# Altium PCB Mfd3.PcbDoc (part 2 of 2)
Units mm, origin at the board's own origin, x right, y up, seen from the top; angles counter-clockwise.
Board outline 190 x 263 mm, 2 copper layers (Top Layer, Bottom Layer), stack 1.671 mm thick; 173 components, 92 nets, 564 pads, 39 vias.
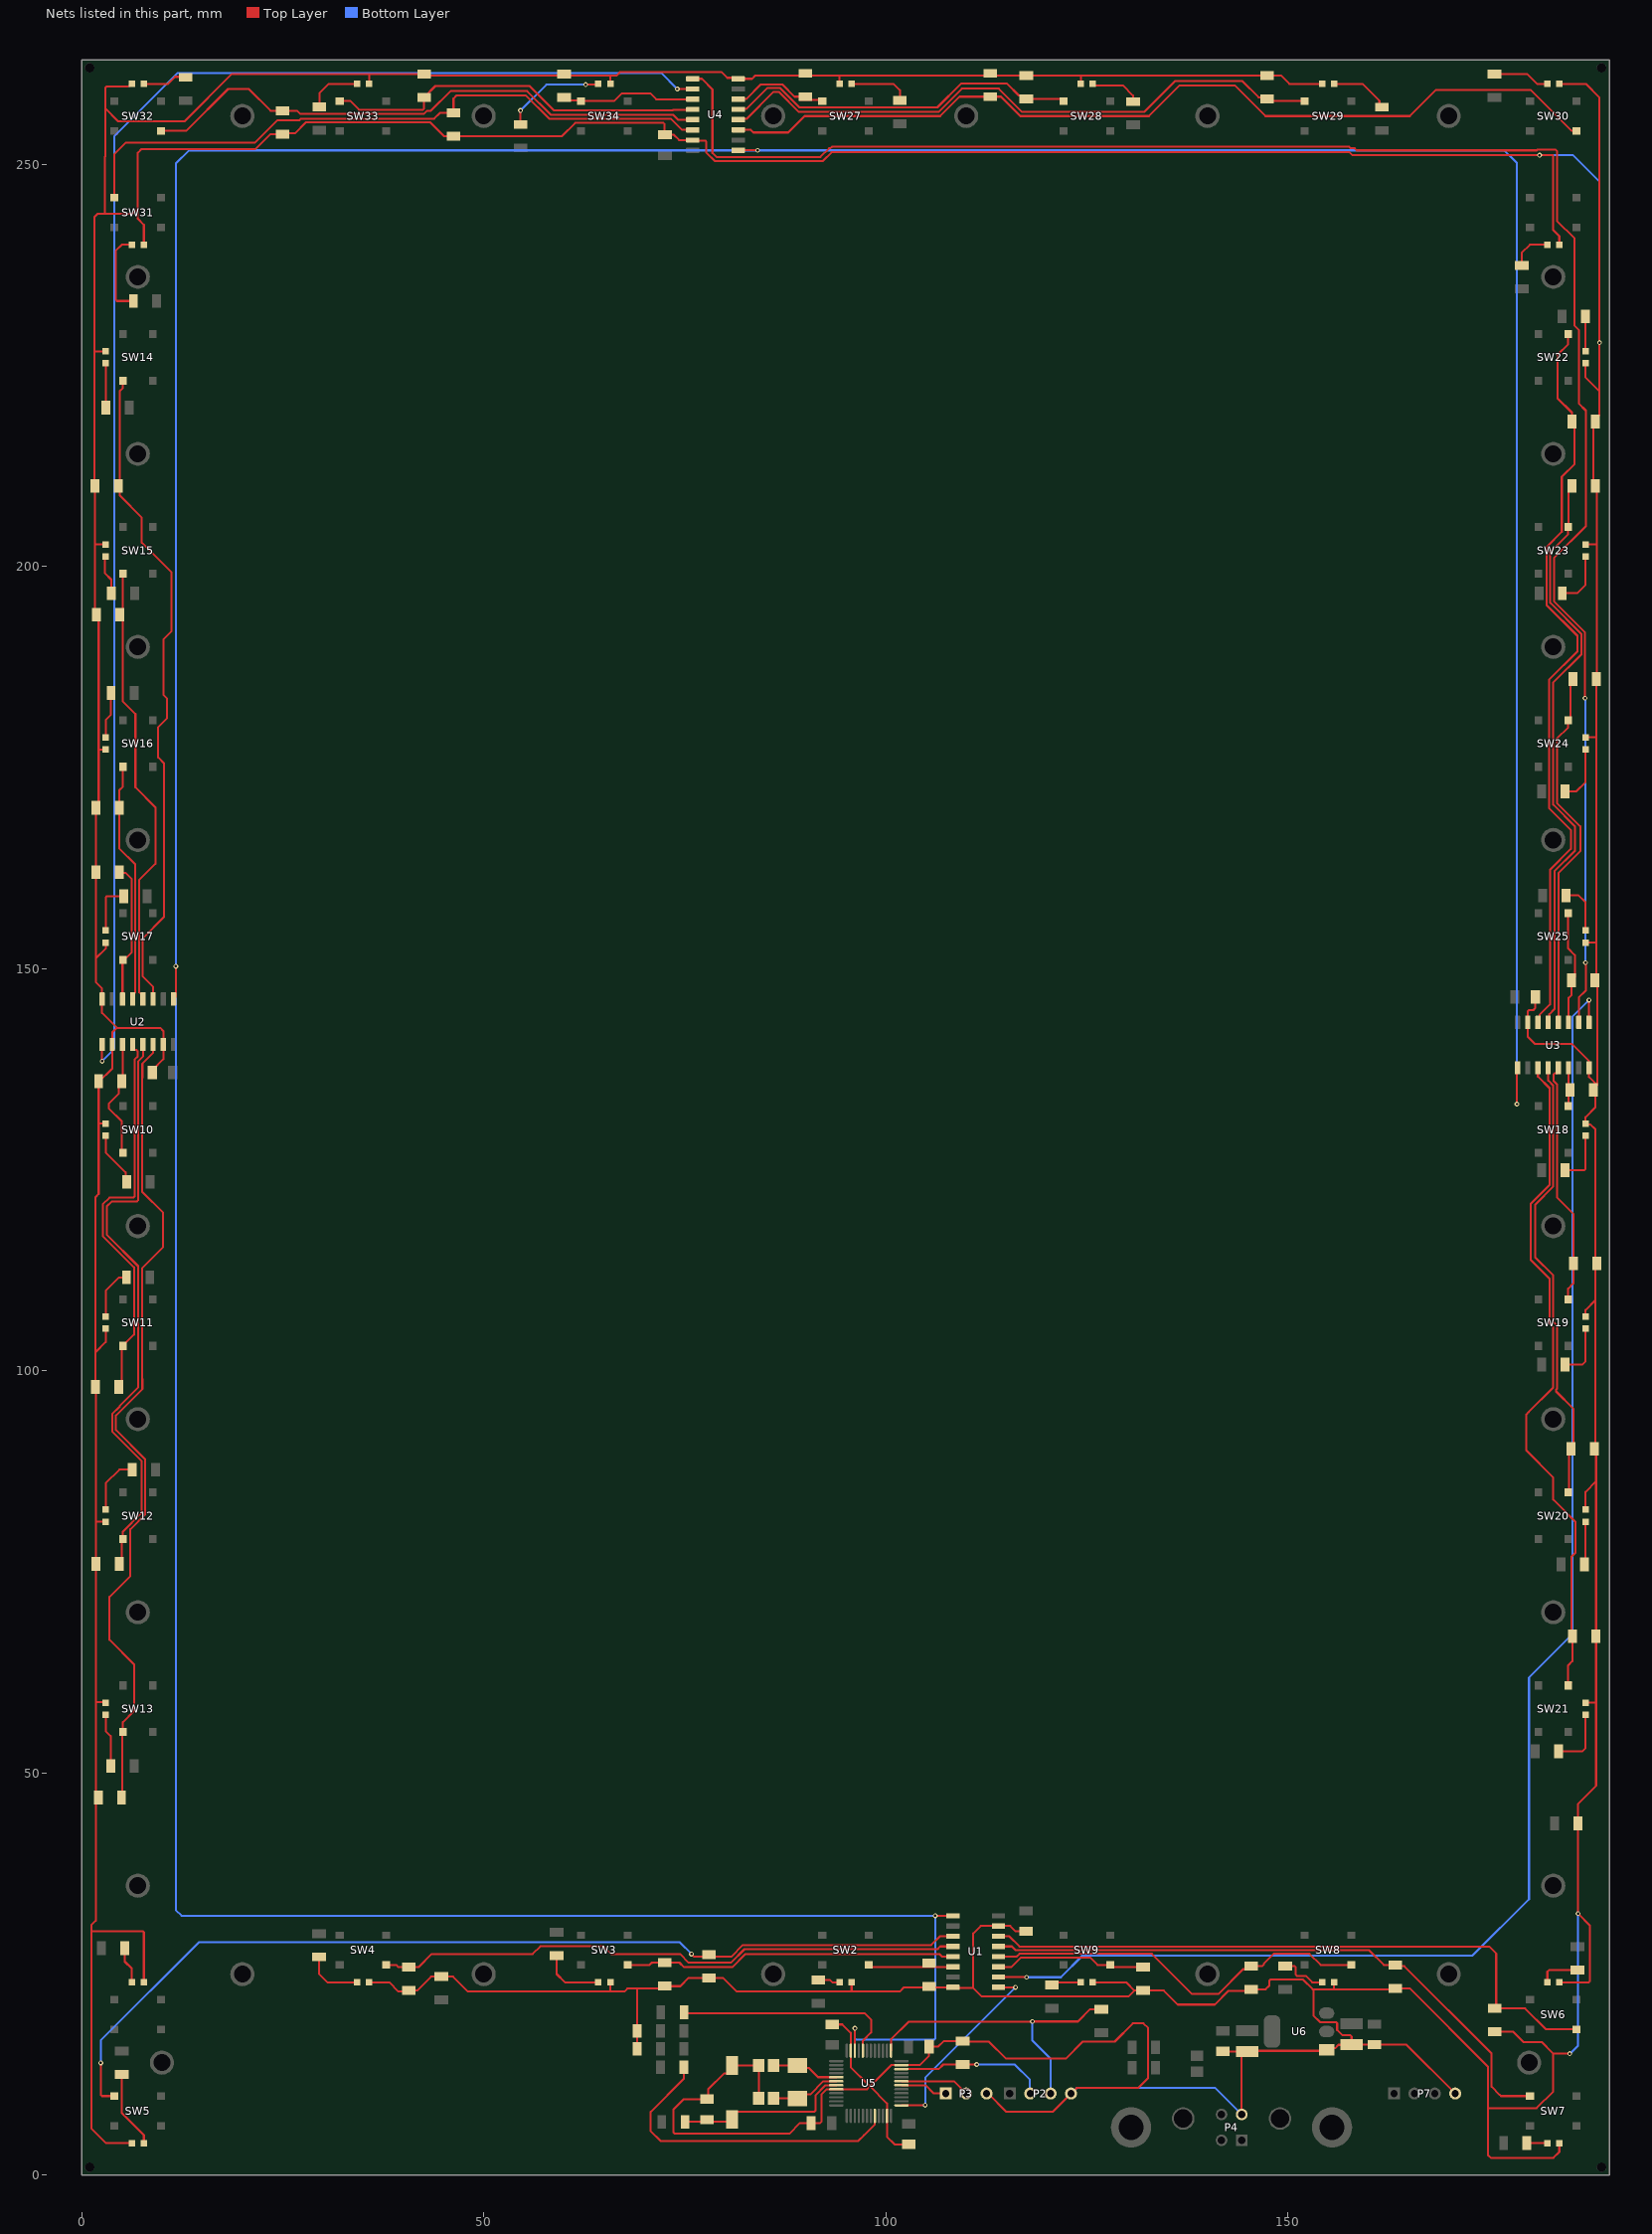
[diagram p2: the nets of this part, all layers, seen from the top]

## Via types
v1: diameter 0.6, hole 0.3, Top Layer to Bottom Layer, tented both sides, 39 vias

## Nets (pads, with @x,y where several pads share a name; then routed paths per layer and width w, separated by ;. In a path a pad name is that pad's centre, name@x,y a point inside that pad or via, vN(x,y) a via of type N, cw(c..) or ccw(c..) an arc to the next point about the centre after c; other vN are vias at no path point) (continued)
GND: C1.1 C2.1 C3.1 C4.1 C7.2 C8.1 C9.2 C10.1 C11.1 C12.1 C13.1 C14.1 C15.1 C16.2 C17.2 LED1.2 LED2.2 LED3.2 LED4.2 LED5.2 LED6.2 LED7.2 LED8.2 LED9.2 LED10.2 LED11.2 LED12.2 LED13.2 LED14.2 LED15.2 LED16.2 LED17.2 LED18.2 LED19.2 LED20.2 LED21.2 LED22.2 LED23.2 LED24.2 LED25.2 LED26.2 LED27.2 LED28.2 LED29.2 LED30.2 LED31.2 LED32.2 LED33.2 LED34.2 P2.4 P3.3 P4.4 P7.4 R1.1 R3.1 R5.1 R7.1 R9.1 R11.1 R13.1 R15.1 R17.1 R19.1 R21.1 R23.1 R25.1 R27.1 R29.1 R31.1 R33.1 R35.1 R37.1 R39.1 R41.1 R43.1 R45.1 R47.1 R49.1 R51.1 R53.1 R55.1 R57.1 R59.1 R61.1 R63.1 R65.1 R67.1 R77.1 SW35.2 U1.8 U1.15 U2.8 U2.10 U2.15 U3.8 U3.15 U4.8 U4.15 U5.8 U5.23 U5.35 U5.47 U6.1 W0.1 W1.1 | length 1442.2
  Top Layer w0.254: R25.1@1.615,210.135 1.615,226.85 ; R25.1@1.646,210 1.657,209.989 1.657,202.85 ; LED15.2@2.875,202.75 1.757,202.75 1.657,202.85 ; LED13.2@3,58.75 2.9,58.85 1.775,58.85 ; LED12.2@3,81.25 1.875,81.25 1.775,81.15 ; LED11.2@3,105.25 3,103.595 1.725,102.32 ; LED10.2@3,130.75 2.225,130.75 2.125,130.85 ; LED17.2@3,153.25 3,152.495 1.775,151.27 ; LED16.2@3,177.25 2.225,177.25 2.125,177.15 ; LED14.2@3,226.75 1.715,226.75 1.615,226.85 ; LED5.2@6.25,4 3.075,4 1.225,5.85 1.225,30.35 ; LED32.2@6.25,260 5.977,259.727 5.88,259.727 5.828,259.675 3.124,259.675 2.975,259.526 2.975,256.9 ; LED1.2@7.75,24 7.75,30.201 7.601,30.35 1.225,30.35 ; LED31.2@7.75,240 7.75,242.475 7,243.225 7,244.509 ; C2.1@8.8,137.1 8.8,137.375 10.175,138.75 U2.15@10.175,140.575 10.175,142.25 9.775,142.65 4.4,142.65 ; R63.1@25,253.75 23.5,253.75 21.639,251.889 7.473,251.889 7,251.416 7,244.509 ; R63.1@25.062,253.687 25.207,253.832 26.528,253.832 27.912,255.216 43.359,255.216 45.086,253.489 R61.1@46.25,253.489 59.739,253.489 61.386,255.136 72.351,255.136 72.5,254.987 72.5,253.724 C4.1@72.55,253.673 73.627,253.673 74.296,253.004 U4.15@75.997,253.004 76.071,252.93 77.551,252.93 77.7,252.781 77.7,251.43 78.738,250.392 92.168,250.392 93.276,251.5 157.65,251.5 158.025,251.125 v1(181.293,251.125) 183,251.125 183,241.81 183.75,241.06 LED26.2@183.75,240 ; LED4.2@35.75,24 38.257,24 39.407,22.85 40.698,22.85 40.855,23.007 41.78,23.007 43.473,24.7 R1.1@44.75,24.7 46.2,24.7 48.05,22.85 65.75,22.85 65.85,22.85 ; LED33.2@35.75,260 35.75,261.125 35.85,261.225 ; LED3.2@65.75,24 65.75,22.95 65.85,22.85 ; LED34.2@65.75,260 65.75,260.899 65.85,260.999 ; W1.1@69.1,15.831 W0.1@69.1,17.944 ; W0.1@69.106,17.95 69.106,23.194 69.131,23.219 ; C7.2@83.85,13.65 SW35.2@80.875,13.65 80.875,13.308 80.252,12.685 79.91,12.685 77.907,10.682 77.907,9.613 C8.1@77.769,9.475 74.9,9.475 73.6,8.175 73.6,5.324 73.749,5.175 88.014,5.175 89.339,6.5 C13.1@90.725,6.5 91.851,6.5 92,6.649 92,10.05 92.65,10.7 97.669,10.7 98.035,11.065 ; C9.2@84.199,9.575 C7.2@84.199,13.65 ; C12.1@93.35,18.75 94.6,18.75 95.65,17.7 U5.47@95.65,15.5 95.65,13.45 97.795,11.305 98.035,11.065 ; LED27.2@94.25,260 94.25,260.932 94.15,261.032 ; LED2.2@95.75,24 95.75,22.856 95.756,22.85 ; C15.1@102.85,3.852 101.092,3.852 100.15,4.794 100.15,8.95 98.035,11.065 ; 104.625,261.032 94.15,261.032 ; 104.693,261.032 R55.1@117.472,261.032 ; R77.1@109.55,16.625 112.825,16.625 114.946,14.504 122.379,14.504 124.5,16.625 128.468,16.625 130.729,18.886 132.048,18.886 132.632,18.302 132.632,12.107 131.375,10.85 123.746,10.85 123.068,10.172 P2.4@123.035,10.172 120.771,7.909 114.992,7.909 112.728,10.172 P3.3@112.54,10.172 ; R77.1@109.55,16.675 107.197,16.675 106.522,16 C14.1@105.375,16 105.375,14.858 104.217,13.7 100.669,13.7 98.274,11.305 98.035,11.065 ; 110.799,23.348 110.726,23.275 108.454,23.275 U1.8@108.353,23.376 105.799,23.376 105.7,23.475 R3.1@105.4,23.475 105.4,23.376 102.275,23.376 101.749,22.85 95.756,22.85 ; C1.1@117.45,30.327 116.131,30.327 115.462,30.996 U1.15@114.003,30.996 111.805,30.996 110.875,30.066 110.875,23.424 110.875,23.272 111.928,22.219 130.18,22.219 130.925,22.965 ; R55.1@117.472,261.032 124.15,261.033 ; LED28.2@124.25,260 124.25,260.933 124.15,261.033 ; LED9.2@125.75,24 129.89,24 130.925,22.965 ; C11.1@141.925,15.402 C17.2@144.923,15.402 ; P4.4@144.25,7.567 144.25,14.802 144.823,15.375 C17.2@144.95,15.375 ; C17.2@144.95,15.475 154.715,15.475 U6.1@154.825,15.585 155.033,15.793 155.859,15.793 156.284,16.217 C16.2@157.804,16.217 ; R15.1@145.425,23.125 147.233,23.125 147.706,23.598 147.706,24.197 147.855,24.346 151.866,24.346 153.087,23.125 153.183,23.125 ; R15.1@145.837,22.925 142.6,22.925 140.9,21.225 136.3,21.225 134.56,22.965 R17.1@132,22.965 130.925,22.965 ; LED29.2@154.25,260 150.175,260 149.142,261.033 R57.1@147.423,261.033 124.15,261.033 ; LED8.2@155.75,24 155.75,23.248 155.627,23.125 ; C16.2@157.849,16.172 C16.2@157.916,16.238 ; P7.4@170.81,10.172 164.744,16.238 C10.1@160.766,16.238 C16.2@157.916,16.238 ; R11.1@175.725,17.85 178,17.85 179.275,16.575 181.55,16.575 182.875,15.25 183,15.125 ; C3.1@180.775,146.5 180.775,145.113 180.506,144.844 179.974,144.844 179.825,144.695 U3.15@179.825,143.325 179.825,141.55 180.75,140.625 185.35,140.625 187.445,138.53 U3.8@187.445,137.675 187.445,136.517 188.112,135.85 188.137,135.85 188.475,135.512 188.475,148.446 R49.1@188.375,148.546 ; LED7.2@183.75,4 183.75,2.9 183.025,2.175 175.225,2.175 174.887,2.513 174.887,8.35 ; LED6.2@183.75,24 187.401,24 187.55,24.149 187.55,31.05 v1(186.075,32.525) R51.1@186.075,43.75 186.075,46.175 188.325,48.425 188.325,58.85 ; LED30.2@183.75,260 187.05,260 188.75,258.3 v1(188.75,227.825) 188.75,221.75 ; v1(185.054,15.125) 183,15.125 ; LED21.2@187,58.75 188.225,58.75 188.325,58.85 ; LED20.2@187,82.75 187,84.95 188.325,86.275 ; LED19.2@187,106.75 187,107.578 188.225,108.803 ; LED25.2@187,153.25 188.25,153.25 188.35,153.15 ; LED24.2@187,178.75 188.35,178.75 ; LED23.2@187,202.75 188.325,202.75 188.425,202.85 ; LED22.2@187,225.25 187,223.5 188.75,221.75 ; R43.1@187.975,218 187.975,210.25 R45.1@188.225,210 188.425,209.8 188.425,202.85 ; R35.1@188,134.925 188.225,134.7 188.225,132.775 187,131.55 LED18.2@187,130.75 187.132,130.618 187.632,130.618 188.225,130.025 R37.1@188.225,113.375 ; R47.1@188.15,185.8 R47.1@188.35,186 ; R49.1@188.175,148.546 188.35,148.721 188.35,153.15 ; R43.1@188.225,218 188.225,218.3 188.75,218.825 188.75,221.75 ; R37.1@188.4,113.375 188.225,113.2 188.225,108.803 ; 1.225,30.35 1.225,31.099 1.775,31.649 1.775,58.85 ; 1.615,226.85 1.615,243.474 1.971,243.829 2.875,243.829 ; 1.657,202.85 1.657,194 2.125,193.532 2.125,177.15 ; 1.725,102.32 1.725,121.6 2.125,122 2.125,130.85 ; 1.725,102.32 R31.1@1.725,98 1.775,97.95 1.775,81.15 ; 1.775,58.85 R29.1@1.775,76 1.775,81.15 ; 1.775,151.27 R19.1@1.775,162 1.8,162.025 R21.1@1.8,170 2.125,170.325 2.125,177.15 ; 1.775,151.27 1.775,148.325 2.555,147.545 U2.8@2.555,146.225 2.555,144.495 4.4,142.65 ; 2.125,130.85 2.125,135.9 3.825,137.6 U2.10@3.825,140.575 3.825,142.075 4.4,142.65 ; 2.875,243.829 2.875,250.917 2.975,251.017 2.975,256.9 ; 2.875,243.829 6.32,243.829 7,244.509 ; 2.975,256.9 4.51,255.365 12.848,255.365 18.708,261.225 35.85,261.225 ; 35.85,261.225 R65.1@42.6,261.225 42.826,260.999 65.85,260.999 ; 65.85,22.85 67.5,22.85 67.869,23.219 69.131,23.219 ; 65.85,260.999 66.505,260.999 66.98,261.475 79.563,261.475 80.288,260.75 81.521,260.75 U4.8@81.647,260.624 83.374,260.624 83.782,261.032 94.15,261.032 ; 69.131,23.219 72.277,23.219 72.566,23.509 74.458,23.509 75.5,24.55 76,24.55 R9.1@78,24.55 79.765,24.55 81.465,22.85 95.756,22.85 ; 153.183,23.125 155.627,23.125 ; 153.183,23.125 153.183,19.873 154.023,19.033 155.978,19.033 156.127,18.884 156.127,18.065 156.793,17.399 157.767,17.399 157.916,17.25 C16.2@157.916,16.238 ; 155.627,23.125 155.75,23.125 163.225,23.125 R13.1@163.35,23.25 165.15,23.25 174.887,13.513 174.887,8.35 ; 174.887,8.35 180.925,8.35 183,10.425 183,12.875 183,15.125 ; 188.225,108.803 188.225,90.45 R39.1@188.1,90.325 188.325,90.1 188.325,86.275 ; 188.325,58.85 188.325,86.275 ; 188.35,153.15 188.35,178.75 ; 188.35,178.75 R47.1@188.35,186 ; R47.1@188.35,186 188.425,186.075 188.425,202.85
  Bottom Layer w0.254: P2.4@123.035,10.172 123.068,10.172 123.746,10.85 140.967,10.85 P4.4@144.25,7.567 ; v1(181.293,251.125) 185.47,251.125 188.75,247.845 v1(188.75,227.825) ; v1(185.054,15.125) 185.077,15.125 186.075,16.123 v1(186.075,32.525)
NetC7_1: C7.1 U5.5 X1.2 | length 8.1
  Top Layer w0.254: C7.1@86.4,13.65 X1.2@89,13.65 89.307,13.343 90.432,13.343 91.575,12.2 U5.5@93.85,12.2
NetC8_2: C8.2 R76.2 SW35.1 U5.7 | length 22
  Top Layer w0.254: R76.2@75.05,6.65 77.499,6.65 80.575,6.65 SW35.1@80.875,6.95 80.875,7.277 81.498,7.9 91.097,7.9 91.246,8.049 91.246,9.938 92.508,11.2 U5.7@93.85,11.2
NetC9_1: C9.1 U5.6 X1.1 | length 8.4
  Top Layer w0.254: C9.1@86.4,9.575 86.425,9.55 X1.1@89,9.55 89.5,10.05 90.6,10.05 92.25,11.7 U5.6@93.85,11.7
NetLED1_1: LED1.1 R2.1 | length 4.6
  Top Layer w0.254: R2.1@5.375,28.25 5.375,26.575 6.25,25.7 LED1.1@6.25,24
NetLED2_1: LED2.1 R4.1 | length 2.8
  Top Layer w0.254: R4.1@91.6,24.3 93.05,24.3 93.35,24 LED2.1@94.25,24
NetLED3_1: LED3.1 R6.1 | length 7.9
  Top Layer w0.254: R6.1@59.075,27.325 59.075,25.025 60.1,24 LED3.1@64.25,24
NetLED4_1: LED4.1 R8.1 | length 7.3
  Top Layer w0.254: R8.1@29.525,27.15 29.525,25.05 30.575,24 LED4.1@34.25,24
NetLED5_1: LED5.1 R10.1 | length 9.7
  Top Layer w0.254: R10.1@5,12.533 5,7.75 7.75,5 LED5.1@7.75,4
NetLED6_1: LED6.1 R12.1 | length 5.1
  Top Layer w0.254: LED6.1@182.25,24 182.267,24.017 182.267,25.309 182.467,25.509 R12.1@186,25.509
NetLED7_1: LED7.1 R14.1 | length 2.5
  Top Layer w0.254: R14.1@179.725,4 LED7.1@182.25,4
NetLED8_1: LED8.1 R16.1 | length 6
  Top Layer w0.254: R16.1@149.677,26.025 150.826,26.025 150.975,25.876 150.975,24.949 151.124,24.8 152.212,24.8 153.012,24 LED8.1@154.25,24
NetLED9_1: LED9.1 R18.1 | length 3.7
  Top Layer w0.254: R18.1@120.655,23.669 120.985,24 LED9.1@124.25,24
NetLED10_1: LED10.1 R34.1 | length 6.8
  Top Layer w0.254: LED10.1@3,129.25 3,127.15 5.475,124.675 5.475,123.625 R34.1@5.6,123.5
NetLED11_1: LED11.1 R32.1 | length 6.5
  Top Layer w0.254: LED11.1@3,106.75 3,109.976 4.65,111.626 R32.1@5.595,111.626
NetLED12_1: LED12.1 R30.1 | length 7.6
  Top Layer w0.254: LED12.1@3,82.75 3,86.025 4.7,87.725 R30.1@6.3,87.725 ; R30.1@5.975,87.9 R30.1@6.225,88.15
NetLED13_1: LED13.1 R28.1 | length 6.6
  Top Layer w0.254: LED13.1@3,57.25 3,55.225 3.625,54.6 R28.1@3.625,50.9
NetLED14_1: LED14.1 R26.1 | length 5.5
  Top Layer w0.254: LED14.1@3,225.25 3,219.77 R26.1@3.018,219.751
NetLED15_1: LED15.1 R24.1 | length 4.9
  Top Layer w0.254: LED15.1@2.875,201.25 2.875,199.194 3.7,198.369 R24.1@3.7,196.65
NetLED16_1: LED16.1 R22.1 | length 5.8
  Top Layer w0.254: LED16.1@3,178.75 3,180.9 3.669,181.569 R22.1@3.669,184.286
NetLED17_1: LED17.1 R20.1 | length 6.4
  Top Layer w0.254: LED17.1@3,154.75 3,158.851 3.149,159 R20.1@5.229,159
NetLED18_1: LED18.1 R36.1 | length 6.8
  Top Layer w0.254: R36.1@184.45,124.952 186.851,124.952 187,125.101 LED18.1@187,129.25
NetLED19_1: LED19.1 R38.1 | length 6.8
  Top Layer w0.254: R38.1@184.45,100.772 186.6,100.772 187,101.172 LED19.1@187,105.25
NetLED20_1: LED20.1 R40.1 | length 5.4
  Top Layer w0.254: R40.1@186.85,75.931 187,76.081 LED20.1@187,81.25
NetLED21_1: LED21.1 R42.1 | length 7.6
  Top Layer w0.254: R42.1@183.675,52.7 186.6,52.7 187,53.1 LED21.1@187,57.25
NetLED22_1: LED22.1 R44.1 | length 4.3
  Top Layer w0.254: R44.1@186.975,231.075 186.975,226.775 LED22.1@187,226.75
NetLED23_1: LED23.1 R46.1 | length 6.8
  Top Layer w0.254: R46.1@184.125,196.672 185.962,196.672 187,197.709 LED23.1@187,201.25
NetLED24_1: LED24.1 R48.1 | length 7.1
  Top Layer w0.254: R48.1@184.45,172.042 185.875,172.042 187,173.167 LED24.1@187,177.25
NetLED25_1: LED25.1 R50.1 | length 6.3
  Top Layer w0.254: R50.1@184.6,159.106 186.15,159.106 187,158.256 LED25.1@187,154.75
NetLED26_1: LED26.1 R52.1 | length 5.2
  Top Layer w0.254: R52.1@179.075,237.425 179.075,238.976 180.099,240 LED26.1@182.25,240
NetLED27_1: LED27.1 R54.1 | length 7.6
  Top Layer w0.254: LED27.1@95.75,260 100.95,260 101.75,259.2 R54.1@101.75,257.947
NetLED28_1: LED28.1 R56.1 | length 6.3
  Top Layer w0.254: LED28.1@125.75,259.8 129.482,259.8 130.747,258.535 R56.1@130.747,257.787
NetLED29_1: LED29.1 R58.1 | length 7.4
  Top Layer w0.254: LED29.1@155.75,260 159.26,260 161.377,257.882 161.377,257.398 R58.1@161.675,257.1
NetLED30_1: LED30.1 R60.1 | length 7.8
  Top Layer w0.254: R60.1@175,261.225 R60.1@175.7,261.225 179.75,261.225 180.975,260 LED30.1@182.25,260
NetLED31_1: LED31.1 R62.1 | length 10.7
  Top Layer w0.254: LED31.1@6.25,240 5,240 4.25,239.25 4.25,233.15 4.4,233 R62.1@6.45,233
NetLED32_1: LED32.1 R64.1 | length 5.6
  Top Layer w0.254: LED32.1@7.75,260 10.75,260 11.625,260.875 12.861,260.875 R64.1@12.932,260.804
NetLED33_1: LED33.1 R66.1 | length 6.9
  Top Layer w0.254: R66.1@29.576,257.12 29.576,258.854 30.722,260 LED33.1@34.25,260
NetLED34_1: LED34.1 R68.1 | length 12.8
  Top Layer w0.254: R68.1@54.581,254.939 v1(54.581,256.694) ; v1(62.698,259.906) 64.156,259.906 LED34.1@64.25,260
  Bottom Layer w0.254: v1(54.581,256.694) 57.793,259.906 v1(62.698,259.906)
NetR3_2: R3.2 SW2.1 U1.6 | length 10.6
  Top Layer w0.254: SW2.1@97.9,26.15 98.179,25.871 108.308,25.871 U1.6@108.353,25.916
NetR5_2: R5.2 SW3.1 U1.5 | length 41.6
  Top Layer w0.254: SW3.1@67.9,26.15 70.635,26.15 70.935,26.45 R5.2@72.528,26.45 74.343,26.45 74.925,25.868 80.918,25.868 82.561,27.511 106.653,27.511 106.978,27.186 U1.5@108.353,27.186
NetR7_2: R7.2 SW4.1 U1.4 | length 73.3
  Top Layer w0.254: SW4.1@37.9,26.15 39.125,26.15 39.407,25.868 41.893,25.868 43.528,27.503 56.076,27.503 57.049,28.475 64.89,28.475 65.862,27.503 74.422,27.503 75.5,26.425 80.75,26.425 82.434,28.109 106.426,28.109 106.773,28.456 U1.4@108.353,28.456
NetR9_2: R9.2 SW5.1 U1.3 | length 121.5
  Top Layer w0.254: v1(2.4,13.983) 2.4,9.999 2.549,9.85 SW5.1@4.263,9.85 ; v1(75.827,27.503) 76.155,27.175 80.782,27.175 82.224,28.617 105.642,28.617 106.75,29.725 108.352,29.725 U1.3@108.353,29.726
  Bottom Layer w0.254: v1(2.4,13.983) 2.4,16.775 14.603,28.978 74.353,28.978 v1(75.827,27.503)
NetR11_2: R11.2 SW6.1 U1.14 | length 80.9
  Top Layer w0.254: U1.14@114.003,29.726 115.338,29.726 116.614,28.45 155.058,28.45 155.061,28.447 160.27,28.447 ; 160.271,28.446 175.029,28.446 175.9,27.575 175.9,20.925 R11.2@175.725,20.75 179.506,20.75 182.106,18.15 SW6.1@185.9,18.15
NetR13_2: R13.2 SW7.1 U1.13 | length 76.2
  Top Layer w0.254: U1.13@114.003,28.456 115.379,28.456 115.675,28.456 116.138,27.993 160.082,27.993 161.925,26.15 R13.2@163.35,26.15 163.507,25.993 164.482,25.993 175.341,15.134 175.341,11.008 176.35,9.999 176.499,9.85 SW7.1@180.1,9.85
NetR15_2: R15.2 SW8.1 U1.12 | length 48.3
  Top Layer w0.254: U1.12@114.503,27.186 116.269,27.186 116.622,27.539 133.086,27.539 138.092,22.533 141.333,22.533 144.409,25.61 145.009,25.61 R15.2@145.425,26.025 146.851,26.025 147,26.174 147,26.304 148.235,27.539 152.686,27.539 154.075,26.15 SW8.1@157.9,26.15
NetR17_2: R17.2 SW9.1 U1.11 | length 19
  Top Layer w0.254: U1.11@114.003,25.916 115.641,25.916 116.81,27.085 125.39,27.085 126.325,26.15 SW9.1@127.9,26.15 128.185,25.865 R17.2@132,25.865
NetR19_2: R19.2 SW17.1 U2.6 | length 17.3
  Top Layer w0.254: R19.2@4.675,162 4.749,161.926 5.475,161.926 6.225,161.176 6.225,152 5.095,150.87 U2.6@5.095,146.225
NetR21_2: R21.2 SW16.1 U2.5 | length 30
  Top Layer w0.254: SW16.1@5.15,175.1 5.15,172.65 4.668,172.168 4.668,170 4.668,164.969 6.679,162.958 6.679,147.039 6.365,146.725 U2.5@6.365,146.225
NetR23_2: R23.2 SW15.1 U2.4 | length 55.7
  Top Layer w0.254: SW15.1@5.15,199.1 5.119,199.069 5.119,194 5.119,183.231 6.7,181.65 6.7,172.55 9.187,170.063 9.187,163.037 7.15,161 7.15,147.072 7.299,146.923 7.437,146.923 7.635,146.725 U2.4@7.635,146.225
NetR25_2: R25.2 SW14.1 U2.3 | length 82.7
  Top Layer w0.254: SW14.1@5.15,223.1 5.15,222.207 4.75,221.807 4.75,210 4.75,208.825 7.5,206.075 7.5,202.95 11.209,199.241 11.209,191.959 10.181,190.931 10.181,184.044 10.65,183.575 10.65,181.144 9.54,180.033 9.54,176.26 10.256,175.544 10.256,156.444 7.604,153.792 7.604,149.032 8.905,147.731 U2.3@8.905,146.225
NetR27_2: R27.2 SW13.1 U2.14 | length 102.5
  Top Layer w0.254: R27.2@5.075,46.975 5.075,55.025 SW13.1@5.15,55.1 5.15,56.332 6.55,57.732 6.55,63.5 3.475,66.575 3.475,71.9 6.075,74.5 6.075,80.308 7.902,82.135 7.902,89.013 4.275,92.641 4.275,94.457 7.567,97.749 7.567,98.965 7.553,98.979 7.553,112.803 10.14,115.39 10.14,119.644 7.553,122.231 7.553,136.439 7.567,136.453 7.567,138.197 8.888,139.518 8.888,140.158 U2.14@8.905,140.175
NetR29_2: R29.2 SW12.1 U2.13 | length 74.2
  Top Layer w0.254: R29.2@4.403,75.403 5,76 5,78.9 5.15,79.05 5.15,80.025 7.448,82.323 7.448,88.825 3.821,92.452 3.821,94.645 4.775,95.599 4.775,95.675 7.059,97.959 7.059,98.754 7.045,98.768 7.045,113.026 3.141,116.93 3.141,120.442 3.783,121.084 6.896,121.084 7.045,121.233 7.045,136.649 7.059,136.663 7.059,138.504 7.635,139.08 U2.13@7.635,140.175
NetR31_2: R31.2 SW11.1 U2.12 | length 48.9
  Top Layer w0.254: R31.2@4.625,98 5,98.375 5,102.95 SW11.1@5.15,103.1 5.15,103.15 6.525,104.525 6.525,112.87 2.633,116.762 2.633,120.701 3.47,121.538 6.442,121.538 6.591,121.687 6.591,138.678 6.983,139.07 6.983,139.743 6.834,139.892 6.563,139.892 6.365,140.09 U2.12@6.365,140.575
NetR33_2: R33.2 SW10.1 U2.11 | length 15.7
  Top Layer w0.254: SW10.1@5.025,127.1 5.025,131 3.375,132.65 3.375,133.217 4.61,134.451 4.61,135.277 4.858,135.525 5.15,135.525 U2.11@5.15,141.23
NetR35_2: R35.2 SW18.1 U3.6 | length 4.3
  Top Layer w0.254: SW18.1@184.85,132.9 184.905,132.955 U3.6@184.905,137.175
NetR37_2: R37.2 SW19.1 U3.5 | length 30.5
  Top Layer w0.254: U3.5@183.635,137.675 183.635,137.19 183.437,136.992 183.166,136.992 183.017,136.843 183.017,136.078 183.454,135.641 183.454,121.584 185.5,119.538 R37.2@185.5,113.375 185.5,110.875 184.85,110.225 SW19.1@184.85,108.9
NetR39_2: R39.2 SW20.1 U3.4 | length 55.8
  Top Layer w0.254: U3.4@182.365,137.175 182.365,136.087 183,135.452 183,122.925 180.75,120.675 180.75,114.125 183,111.875 183,106.1 183.454,105.646 183.454,97.762 183.351,97.659 183.351,97.449 185.5,95.3 185.5,90.625 184.969,90.094 184.969,85.019 SW20.1@184.85,84.9
NetR41_2: R41.2 SW21.1 U3.3 | length 83.9
  Top Layer w0.254: U3.3@181.095,137.175 181.095,136.6 182.546,135.149 182.546,123.13 180.2,120.784 180.2,113.8 182.546,111.454 182.546,105.912 183,105.458 183,97.95 179.925,94.875 179.925,94.873 179.65,94.598 179.65,90.1 183,86.75 183,84 185.756,81.244 185.756,77.387 185.244,76.875 185.244,67.131 R41.2@185.375,67 185.375,63.925 184.85,63.4 SW21.1@184.85,60.9 SW21.1@185.173,61.223
NetR43_2: R43.2 SW22.1 U3.14 | length 94.5
  Top Layer w0.254: U3.14@181.293,143.023 181.293,144.247 182.583,145.538 182.583,162.27 185.192,164.879 185.192,167.244 182.475,169.961 182.475,176.133 182.479,176.137 182.479,184.313 182.475,184.317 182.475,185.922 186,189.447 186,191.375 182.175,195.2 182.175,202.425 184.061,204.311 184.061,211.161 185.65,212.75 185.65,217.675 R43.2@185.325,218 185.325,219.125 183.525,220.925 183.525,226.3 184.85,227.625 SW22.1@184.85,228.9
NetR45_2: R45.2 SW23.1 U3.13 | length 73.6
  Top Layer w0.254: U3.13@182.509,142.969 182.509,144.334 183.15,144.975 183.15,162.118 185.7,164.668 185.7,167.7 183,170.4 183,185.588 186.496,189.084 186.496,191.612 182.629,195.479 182.629,201.804 184.85,204.025 SW23.1@184.85,204.9 ; SW23.1@184.9,204.9 184.9,209.275 185.325,209.7 R45.2@185.325,210
NetR47_2: R47.2 SW24.1 U3.12 | length 45.8
  Top Layer w0.254: U3.12@183.635,143.325 183.635,161.885 186.351,164.601 186.351,167.691 183.454,170.588 183.454,178.604 184.85,180 SW24.1@184.85,180.9 185.167,181.217 185.167,185.842 R47.2@185.325,186
NetR49_2: R49.2 SW25.1 U3.11 | length 14.2
  Top Layer w0.254: SW25.1@184.85,156.9 184.85,152.512 185.683,151.679 185.683,148.954 R49.2@185.275,148.546 185.275,146.731 184.905,146.361 U3.11@184.905,143.325
NetR53_2: R53.2 SW27.1 U4.6 | length 12.6
  Top Layer w0.254: U4.6@81.647,258.084 81.711,258.149 82.704,258.149 84.463,259.908 87.142,259.908 88.65,258.4 R53.2@90,258.4 ; R53.2@89.3,258 91.95,258 SW27.1@92.1,257.85
NetR55_2: R55.2 SW28.1 U4.5 | length 44.7
  Top Layer w0.254: U4.5@81.647,256.814 81.731,256.898 82.704,256.898 85.26,259.454 86.888,259.454 89.275,257.067 106.408,257.067 109.355,260.013 115.087,260.013 116.545,258.555 117.049,258.555 R55.2@117.472,258.132 ; R55.2@117.472,258.132 121.819,258.131 SW28.1@122.1,257.85
NetR57_2: R57.2 SW29.1 U4.4 | length 77.9
  Top Layer w0.254: U4.4@81.647,255.544 81.755,255.652 82.691,255.652 86.039,259 86.7,259 89.203,256.497 106.55,256.497 109.457,259.403 114.047,259.403 116.953,256.497 132.122,256.497 135.95,260.325 144.35,260.325 146.34,258.334 147.221,258.334 147.705,257.85 SW29.1@152.1,257.85
NetR59_2: R59.2 SW30.1 U4.3 | length 113.9
  Top Layer w0.254: U4.3@81.647,254.274 83.226,254.274 83.551,253.949 87.874,253.949 89.914,255.989 106.761,255.989 109.172,258.4 R59.2@113,258.4 114.325,258.4 116.736,255.989 132.714,255.989 136.542,259.817 143.393,259.817 145.573,257.637 147.221,255.989 165.164,255.989 168.431,259.256 180.179,259.256 185.285,254.15 SW30.1@185.9,254.15
NetR61_2: R61.2 SW31.1 U4.14 | length 83.2
  Top Layer w0.254: SW31.1@4.1,245.85 4.1,251.276 5.524,252.7 21.575,252.7 24.325,255.45 27.058,255.45 27.278,255.67 43.845,255.67 44.565,256.389 R61.2@46.25,256.389 46.25,258.172 46.653,258.575 55.225,258.575 58.144,255.656 73.28,255.656 74.662,254.274 U4.14@75.997,254.274
NetR63_2: R63.2 SW32.1 U4.13 | length 72.3
  Top Layer w0.254: SW32.1@9.772,254.15 13.021,254.15 18.225,259.354 20.796,259.354 23.5,256.65 R63.2@25,256.65 26.808,256.65 27.215,256.243 42.549,256.243 42.956,256.65 43.438,256.65 45.888,259.1 55.4,259.1 58.336,256.164 73.529,256.164 74.149,255.544 U4.13@75.997,255.544
NetR65_2: R65.2 SW33.1 U4.12 | length 47.2
  Top Layer w0.254: SW33.1@32.1,257.85 33.45,257.85 34.513,256.787 42.451,256.787 42.6,256.936 R65.2@42.6,257.85 ; R65.2@42.6,258.325 44,259.725 55.7,259.725 58.731,256.694 73.499,256.694 73.541,256.736 75.919,256.736 U4.12@75.997,256.814
NetR67_2: R67.2 SW34.1 U4.11 | length 16.9
  Top Layer w0.254: R67.2@60,258.35 60.4,257.95 62,257.95 SW34.1@62.1,257.85 66.219,257.85 67.194,258.825 70.7,258.825 71.441,258.084 U4.11@75.997,258.084
NetR70_2: R70.2 U5.44 | length 27.9
  Top Layer w0.254: R70.2@74.925,20.253 75.062,20.115 97.405,20.115 98.175,19.346 98.175,17.757 97.159,16.741 97.159,15.509 U5.44@97.15,15.5
NetR75_2: R75.2 U5.20 | length 40
  Top Layer w0.254: R75.2@74.9,13.425 74.9,12.025 70.775,7.9 70.775,5.479 71.987,4.267 96.591,4.267 97.299,4.975 98.65,6.326 U5.20@98.65,7.4
PL: U1.1 U2.1 U3.1 U4.1 U5.46 | length 639.7
  Top Layer w0.254: U2.1@11.445,146.225 11.721,146.501 v1(11.721,150.3) ; U4.1@81.647,251.734 81.651,251.73 84.07,251.73 v1(84.075,251.725) ; U5.46@96.15,15.5 96.159,15.509 v1(96.159,18.282) ; v1(106.151,32.275) 108.344,32.275 U1.1@108.353,32.266 ; v1(178.475,133.165) 178.475,137.595 U3.1@178.555,137.675
  Bottom Layer w0.254: v1(96.159,18.282) 96.159,16.999 96.308,16.85 106.001,16.85 106.15,16.999 v1@106.15,32.275 ; v1(106.151,32.275) v1@106.15,32.275 ; v1(178.475,133.165) 178.475,250.15 176.9,251.725 v1(84.075,251.725) 13.352,251.725 11.721,250.094 v1(11.721,150.3) 11.721,32.985 12.432,32.275 v1@106.15,32.275
RX: P3.2 U5.31 | length 8.7
  Top Layer w0.254: U5.31@101.95,11.7 108.472,11.7 P3.2@110,10.172
SWCLK: P2.3 R78.1 U5.37 | length 39.2
  Top Layer w0.254: U5.37@100.65,15.5 100.65,16.875 102.892,19.117 118.216,19.117 v1(118.222,19.124) 123.895,19.124 125.424,20.652 R78.1@126.8,20.652 R78.1@126.975,20.477
  Bottom Layer w0.254: v1@118.216,19.117 118.216,16.783 120.495,14.504 P2.3@120.495,10.172
SWDIO: P2.2 R77.2 U5.34 | length 18.7
  Top Layer w0.254: U5.34@101.95,13.2 106.572,13.2 107.147,13.775 R77.2@109.55,13.775 v1(111.3,13.775)
  Bottom Layer w0.254: v1(111.3,13.775) 116.025,13.775 117.922,11.878 117.922,10.205 P2.2@117.955,10.172
TX: P3.1 U5.30 | length 5.9
  Top Layer w0.254: U5.30@101.95,11.2 104.948,11.2 105.976,10.172 P3.1@107.46,10.172
U1_QH: U1.9 U5.25 | length 24.5
  Top Layer w0.254: U5.25@101.95,8.7 101.973,8.723 v1(104.9,8.723) ; U1.9@114.104,23.275 U1.9@114.003,23.376 v1(116.131,23.376)
  Bottom Layer w0.254: v1(104.9,8.723) 104.9,12.145 v1(116.131,23.376)
U2_QH: U2.9 U4.10 | length 193.7
  Top Layer w0.254: v1(2.555,138.504) U2.9@2.555,140.575 ; v1(74.079,259.354) U4.10@75.997,259.354
  Bottom Layer w0.254: v1(2.555,138.504) 4.101,140.05 4.101,253.501 11.95,261.35 72.083,261.35 v1(74.079,259.354)
U3_QH: U1.10 U3.9 | length 187.6
  Top Layer w0.254: U1.10@114.003,24.646 114.014,24.635 117.49,24.635 v1(117.5,24.625) ; U3.9@187.445,143.325 v1(187.445,146.101)
  Bottom Layer w0.254: v1(117.5,24.625) 121.775,24.625 124.456,27.306 172.956,27.306 179.976,34.326 179.976,61.876 185.4,67.3 185.4,144.056 v1(187.445,146.101)
U4_QH: U3.10 U4.9 | length 230.9
  Top Layer w0.254: U4.9@75.997,260.624 77.126,260.624 78.45,259.3 78.45,251.399 78.949,250.9 91.879,250.9 92.961,251.982 93.117,251.982 93.313,252.179 157.613,252.179 157.81,251.982 158.305,251.982 158.562,251.725 180.93,251.725 181.011,251.806 183.301,251.806 183.454,251.653 183.454,242.971 185.654,240.771 185.654,229.921 186.175,229.4 186.175,220.25 187.05,219.375 187.05,204.997 183.083,201.03 183.083,195.667 186.95,191.8 v1(186.95,183.625) ; U3.10@186.175,142.825 186.175,146.4 187.035,147.26 187.035,150.714 v1(187,150.75)
  Bottom Layer w0.254: v1(186.95,183.625) 187,183.575 v1(187,150.75)
pads on no net: P4.5 P4.6 SW1.2 SW1.3 SW2.2 SW2.3 SW3.2 SW3.3 SW4.2 SW4.3 SW5.2 SW5.3 SW6.2 SW6.3 SW7.2 SW7.3 SW8.2 SW8.3 SW9.2 SW9.3 SW10.2 SW10.3 SW11.2 SW11.3 SW12.2 SW12.3 SW13.2 SW13.3 SW14.2 SW14.3 SW15.2 SW15.3 SW16.2 SW16.3 SW17.2 SW17.3 SW18.2 SW18.3 SW19.2 SW19.3 SW20.2 SW20.3 SW21.2 SW21.3 SW22.2 SW22.3 SW23.2 SW23.3 SW24.2 SW24.3 SW25.2 SW25.3 SW26.2 SW26.3 SW27.2 SW27.3 SW28.2 SW28.3 SW29.2 SW29.3 SW30.2 SW30.3 SW31.2 SW31.3 SW32.2 SW32.3 SW33.2 SW33.3 SW34.2 SW34.3 U1.7 U2.7 U3.7 U4.7 U5.1 U5.2 U5.3 U5.4 U5.10 U5.11 U5.12 U5.13 U5.14 U5.15 U5.16 U5.17 U5.18 U5.19 U5.26 U5.27 U5.28 U5.29 U5.38 U5.40 U5.41 U5.42 U5.43 U5.45

## Polygon pours and split planes (outlines as drawn)
GND on Top Layer "NONET_L-01_P-001" (solid, pour order 0): 0,263 190,263 190,0 0,0
GND on Bottom Layer "NONET_L-01_P-001" (solid, pour order 1): 0,263 190,263 190,0 0,0

## Silkscreen, mask and mechanical layers (free items; w line width, h text height)
Top Overlay:
  text "u2_qh" at 69.459,259.346 h0.8
  text "86" at 84.036,258.013 h1.52
  text "+3.3" at 13.404,256.004 h0.8
  text "clk" at 85.193,252.933 h0.8
  text "50" at 48.754,252.436 h1.52
  text "20/256" at 13.606,252.404 h1.52
  text "140" at 138.478,252.415 h1.52
  text "110" at 108.604,252.204 h1.52
  text "gnd" at 179.554,251.884 h0.8
  text "170" at 168.204,251.804 h1.52
  text "pl" at 85.447,251.421 h0.8
  text "+3.3" at 8.679,249.454 h0.8
  text "b4" at 178.231,248.254 h0.8
  text "+3.3" at 186.279,237.729 h0.8
  text "236" at 9.054,235.604 h1.52
  text "236" at 185.118,234.804 h1.52
  text "+3.3" at 185.654,232.629 h0.8
  text "gnd" at 188.9,229.154 h0.8 r90
  text "214" at 3.869,216.443 h1.52
  text "214" at 178.779,209.804 h1.52
  text "190" at 10.179,190.529 h1.52
  text "190" at 179.929,186.079 h1.52
  text "166" at 6.904,168.229 h1.52
  text "166" at 185.229,165.829 h1.52
  text "pl" at 11.742,151.49 h0.8
  text "clk" at 10.998,149.858 h0.8 r90
  text "u3_qh" at 185.61,144.837 h0.8
  text "u2_qh" at 3.358,138.226 h0.8
  text "clk" at 176.981,134.767 h0.8
  text "pl" at 178.179,131.696 h0.8
  text "118" at 9.329,115.979 h1.52
  text "118" at 179.754,114.054 h1.52
  text "94" at 9.504,93.602 h1.52
  text "94" at 181.154,89.854 h1.52
  text "70" at 185.498,71.005 h1.52
  text "70" at 7.929,66.429 h1.52
  text "b4" at 184.079,46.379 h0.8
  text "7/36" at 3.979,38.679 h1.52
  text "183/36" at 179.479,38.429 h1.52
  text "gnd" at 185.529,33.971 h0.8
  text "pl" at 104.996,33.111 h0.8
  text "d=2.1 mm" at 6.654,32.129 h1.52
  text "zippo MFD_4 4:3" at 69.725,32.113 h1.52
  text "clk" at 102.029,31.904 h0.8
  text "JLCJLCJLCJLC" at 164.254,30.404 h1.52
  text "140" at 136.304,27.479 h1.52
  text "20/25" at 16.954,27.454 h1.52
  text "u3_qh" at 115.929,25.491 h0.8
  text "50" at 52.514,24.193 h1.52
  text "86" at 80.994,24.193 h1.52
  text "170" at 172.554,24.154 h1.52
  text "+3.3" at 132.629,20.129 h0.8
  text "pl" at 96.01,19.525 h0.8
  text "clk" at 99.754,19.004 h0.8
  text "u1_qh" at 116.229,18.954 h0.8 r90
  text "BOOT0" at 77.849,17.882 h1.52
  text "swclk" at 115.582,17.704 h0.8
  text "+3.3" at 132.529,17.504 h0.8
  text "1" at 76.229,17.232 h1.52
  text "0" at 66.953,17.179 h1.52
  text "SWCLK" at 119.999,16.383 h1 r270
  text "SWDIO" at 117.459,16.217 h1 r270
  text "BOOT1" at 77.849,15.657 h1.52
  text "+3.3" at 114.919,15.217 h1 r270
  text "1" at 76.229,15.007 h1.52
  text "0" at 66.953,14.954 h1.52
  text "GND" at 122.539,14.384 h1 r270
  text "swdio" at 112.474,14.029 h0.8 r90
  text "gnd" at 184.829,13.746 h0.8
  text "180/14" at 172.729,13.404 h1
  text "+5" at 163.732,11.804 h1.52 r90
  text "D-" at 166.372,11.751 h1.52 r90
  text "D+" at 169.216,11.751 h1.52 r90
  text "GND" at 171.499,11.751 h1.52 r90
  text "10/14" at 6.552,10.751 h1
  text "u1_qh" at 104.929,9.729 h0.8 r90
  text "D+" at 139.708,9.054 h1.52
  text "GND" at 143.754,9.054 h1.52
  text "SWCLK" at 120.093,5.554 h1 r270
  text "TX" at 106.379,5.496 h1.52 r270
  text "RX" at 109.129,5.496 h1.52 r270
  text "GND" at 111.654,5.496 h1.52 r270
  text "SWDIO" at 117.553,5.388 h1 r270
  text "+3.3" at 115.013,4.388 h1 r270
  text "GND" at 122.633,3.555 h1 r270
  text "b4" at 98.254,2.529 h0.8
  text "D-" at 139.804,1.379 h1.52
  text "+5" at 145.511,1.354 h1.52
  text "D-" at 166.053,1.201 h1.52 r90
  text "D+" at 168.896,1.201 h1.52 r90
  text "Designed in Ukraine" at 68.916,1.189 h1.52
Bottom Overlay:
  text "GND" at 171.482,15.817 h1.52 r90
  text "+5" at 163.732,14.293 h1.52 r90
  text "D-" at 166.357,14.293 h1.52 r90
  text "D+" at 169.007,14.293 h1.52 r90
  text "GND" at 171.162,5.267 h1.52 r90
  text "+5" at 163.412,3.743 h1.52 r90
  text "D-" at 166.037,3.743 h1.52 r90
  text "D+" at 168.687,3.743 h1.52 r90
  text "TX" at 106.379,2.957 h1.52 r270
  text "RX" at 109.129,2.957 h1.52 r270
  text "GND" at 111.654,1.433 h1.52 r270
  text "+3.3" at 115.013,0.9 h1 r270
  text "SWDIO" at 117.553,0.9 h1 r270
  text "SWCLK" at 120.093,0.9 h1 r270
  text "GND" at 122.633,0.9 h1 r270
Mechanical 1:
  lines w0.2: 13,0 13,20 65,20 65,0 ; 0,0 190,0 190,263 0,263 0,0 ; 14,35 14,249 176,249 176,35 14,35
Mechanical 15:
  lines w0.254: 35,11 35,42 35,52 ; 65,10.5 65,52 ; 95,12 95,42 95,52 ; 125,13 125,42 125,52 ; 155,12 155,42 155,52 ; 160,57 170,57 ; 160,81 170,81 ; 160,105 170,105 ; 160,129 170,129 ; 160,153 170,153 ; 160,177 170,177 ; 160,201 170,201 ; 160,227 170,227 170,242 ; 0,42 20,42 ; 0,42 0,242 ; 0,42 0,22 20,22 ; 0,42 0,17 190,17 190,42 ; 0,242 20,242 ; 0,242 0,262 20,262 ; 20,22 170,22 ; 20,22 20,42 ; 20,42 170,42 ; 20,42 20,242 ; 20,242 170,242 ; 20,242 20,262 ; 20,262 170,262 ; 170,22 190,22 190,42 ; 170,22 170,42 ; 170,42 190,42 ; 170,42 170,242 ; 170,242 190,242 ; 170,242 170,262 ; 170,262 191,262 191,243 190,242 ; 190,42 190,242

## Text inside footprints (layer, text, board x,y; h text height)
P2: Top Overlay "4" at 123.926,10.702 h1.27; Top Overlay "1" at 113.995,11.475 h1.27
P3: Top Overlay "1" at 107.225,11.5 h1.27; Top Overlay "3" at 112.215,11.475 h1.27
P4: Bottom Overlay "+5" at 145.479,2.871 h1.52 r180; Bottom Overlay "D-" at 139.804,2.846 h1.52 r180; Bottom Overlay "D+" at 139.804,10.571 h1.52 r180; Bottom Overlay "GND" at 143.779,10.571 h1.52 r180
P7: Top Overlay "GND" at 171.162,1.201 h1.27 r90; Top Overlay "+5" at 163.412,1.201 h1.27 r90